# Altium PCB ecupcb.PcbDoc (part 2 of 2)
Units mil, origin at the board's own origin, x right, y up, seen from the top; angles counter-clockwise.
Board outline 2295 x 3625 mil, 2 copper layers (Top Layer, Bottom Layer); 63 components, 47 nets, 207 pads, 33 vias.
Unrouted connection lines stored in the file: 1.
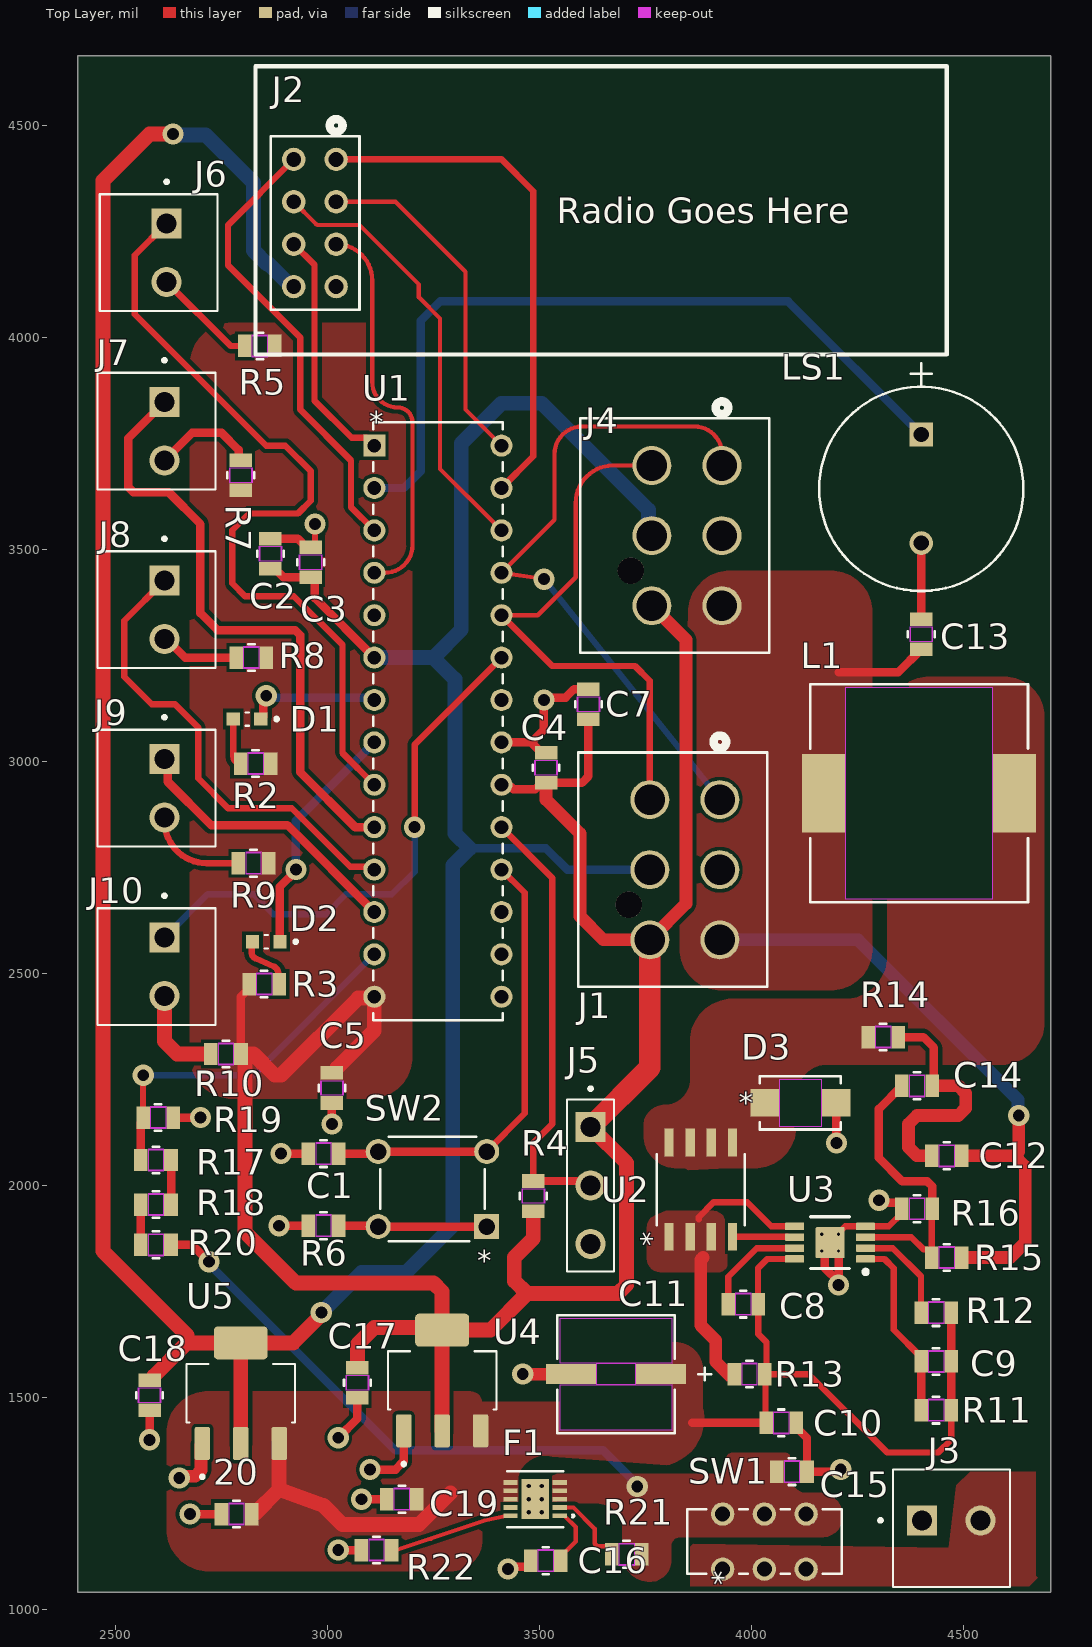
[diagram p0: Top Layer view]

## Part data (continued)
R19 R20: library part "RES 41.2K 1% 0.125W 0805", "Fixed Resistor, Metal Glaze/thick Film, 0.125W, 41200ohm, 150V, 1% +/-Tol, 100ppm/Cel, Surface Mount, 0805", Case/Package=0805, Manufacturer=Vishay, Manufacturer Part Number=CRCW080541K2FKEA, Max Operating Temperature=155°C, Min Operating Temperature=-55°C, Package Height=0.45mm, Package Length=2mm, Package Shape=Rectangular, Package Width=1.25mm, Power=125mW, Rated Temperature=70°C, Resistor Type="FIXED RESISTOR", Temperature Coefficient (ppm/Cel)=100, Tolerance=1%, Working Voltage=150V, Category="Chip SMD Resistors", ComponentLink1Description=https://datasheet.ciiva.com:443/pdfs/VipMasterIC/IC/VISH/VISH-S-A0007266705/VISH-S-A0007266705-1.pdf?src-supplier=IHS+Markit, ComponentLink1URL=https://datasheet.ciiva.com:443/pdfs/VipMasterIC/IC/VISH/VISH-S-A0007266705/VISH-S-A0007266705-1.pdf?src-supplier=IHS+Markit, ComponentLink2Description=https://datasheet.ciiva.com/2467/dcrcwe3-2467875.pdf?src-supplier=Digikey, ComponentLink2URL=https://datasheet.ciiva.com/2467/dcrcwe3-2467875.pdf?src-supplier=Digikey, ComponentLink3Description=https://datasheet.ciiva.com/2467/dcrcwe3-2467876.pdf?src-supplier=Digikey, ComponentLink3URL=https://datasheet.ciiva.com/2467/dcrcwe3-2467876.pdf?src-supplier=Digikey, ComponentLink4Description=https://datasheet.ciiva.com/2467/dcrcwe3-2467877.pdf?src-supplier=Digikey, ComponentLink4URL=https://datasheet.ciiva.com/2467/dcrcwe3-2467877.pdf?src-supplier=Digikey, ComponentLink5Description=https://datasheet.ciiva.com/9009/dcrcwe3-9009672.pdf?src-supplier=Avnet, ComponentLink5URL=https://datasheet.ciiva.com/9009/dcrcwe3-9009672.pdf?src-supplier=Avnet, ComponentLink6Description=https://datasheet.ciiva.com/5552/dcrcwe3-109170-5552669.pdf?src-supplier=Mouser, ComponentLink6URL=https://datasheet.ciiva.com/5552/dcrcwe3-109170-5552669.pdf?src-supplier=Mouser, ComponentLink7Description=https://datasheet.ciiva.com/7671/1697337-7671701.pdf?src-supplier=Element14, ComponentLink7URL=https://datasheet.ciiva.com/7671/1697337-7671701.pdf?src-supplier=Element14, ComponentLink8Description=https://datasheet.ciiva.com/7725/125364-7725967.pdf?src-supplier=Element14, ComponentLink8URL=https://datasheet.ciiva.com/7725/125364-7725967.pdf?src-supplier=Element14, ComponentLink9Description=https://datasheet.ciiva.com/22702/1697337-22702910.pdf?src-supplier=Element14, ComponentLink9URL=https://datasheet.ciiva.com/22702/1697337-22702910.pdf?src-supplier=Element14, ComponentLink10Description=https://datasheet.ciiva.com/16200/dcrcwe3-16200485.pdf?src-supplier=Future+Electronics, ComponentLink10URL=https://datasheet.ciiva.com/16200/dcrcwe3-16200485.pdf?src-supplier=Future+Electronics, Construction=Chip, JESD-609 Code=e3, Mounting Technology="Surface Mount", Packaging="Tape and Reel", Pins=2, Pricing="1=0.0041 (USD)", Reach SVHC Compliant=Yes, Reference Standard=AEC-Q200, RoHS=Yes, RoHS Compliant=Yes, Stock=1, Supplier="Arrow Electronics", Supplier Part Number=CRCW080541K2FKEA, Technology="METAL GLAZE/THICK FILM", Terminal Finish=Nickel, Termination=Wraparound
R21: library part "RES 1M 0.1% 0.26W 0805", "Fixed Resistor, Thin Film, 0.125W, 1000000ohm, 150V, 0.1% +/-Tol, 10ppm/Cel, Surface Mount, 0805", Case/Package=0805, Manufacturer="Vishay Dale", Manufacturer Part Number=TNPW08051M00BYEA, Max Operating Temperature=125°C, Min Operating Temperature=-55°C, Package Height=0.45mm, Package Length=2mm, Package Width=1.25mm, Power=125mW, Rated Temperature=70°C, Resistor Type="FIXED RESISTOR", Supplier Part Number=541-TNPW08051M00BYEACT-ND, Temperature Coefficient (ppm/Cel)=10, Tolerance=0.1%, Working Voltage=150V, Category="Chip SMD Resistors", ComponentLink1Description=https://datasheet.ciiva.com:443/pdfs/VipMasterIC/IC/VISH/VISH-S-A0009889625/VISH-S-A0009889625-1.pdf?src-supplier=IHS+Markit, ComponentLink1URL=https://datasheet.ciiva.com:443/pdfs/VipMasterIC/IC/VISH/VISH-S-A0009889625/VISH-S-A0009889625-1.pdf?src-supplier=IHS+Markit, ComponentLink2Description=http://www.vishay.com/docs/28758/tnpw_e3.pdf?src-supplier=Digikey, ComponentLink2URL=http://www.vishay.com/docs/28758/tnpw_e3.pdf?src-supplier=Digikey, ComponentLink3Description=http://www.vishay.com/docs/28758/tnpw_e3.pdf?src-supplier=Avnet, ComponentLink3URL=http://www.vishay.com/docs/28758/tnpw_e3.pdf?src-supplier=Avnet, Construction=Chip, Mounting Technology="Surface Mount", Packaging="Tape and Reel", Pins=2, Pricing="1=0.8, 10=0.665, 50=0.5832, 100=0.552, 500=0.41224, 1000=0.37822 (USD)", Reach SVHC Compliant=Yes, Reference Standard=AEC-Q200, RoHS=Yes, RoHS Compliant=Yes, Stock=10004, Supplier=Digikey, Technology="THIN FILM", Terminal Finish=Nickel, Termination=Wraparound
R22: library part "RES 142K 0.1% 1/8W 0805", "Fixed Resistor, Thin Film, 0.125W, 142000ohm, 150V, 0.1% +/-Tol, 25ppm/Cel, Surface Mount, 0805", Case/Package=0805, Manufacturer=Yageo, Manufacturer Part Number=RT0805BRD07142KL, Manufacturer Series=RT, Max Operating Temperature=155°C, Min Operating Temperature=-55°C, Package Height=0.5mm, Package Length=2mm, Package Shape=Rectangular, Package Width=1.25mm, Power=125mW, Rated Temperature=70°C, Resistor Type="FIXED RESISTOR", Supplier Part Number=13-RT0805BRD07142KLCT-ND, Temperature Coefficient (ppm/Cel)=25, Tolerance=0.1%, Working Voltage=150V, Category="Chip SMD Resistors", ComponentLink1Description=https://datasheet.ciiva.com:443/pdfs/VipMasterIC/IC/YAGO/YAGOS01974/YAGOS01974-1.pdf?src-supplier=IHS+Markit, ComponentLink1URL=https://datasheet.ciiva.com:443/pdfs/VipMasterIC/IC/YAGO/YAGOS01974/YAGOS01974-1.pdf?src-supplier=IHS+Markit, ComponentLink2Description=https://www.yageo.com/upload/media/product/productsearch/datasheet/rchip/PYu-RT_1-to-0.01_RoHS_L_12.pdf?src-supplier=Digikey, ComponentLink2URL=https://www.yageo.com/upload/media/product/productsearch/datasheet/rchip/PYu-RT_1-to-0.01_RoHS_L_12.pdf?src-supplier=Digikey, Construction=Chip, JESD-609 Code=e3, Mounting Technology="Surface Mount", Packaging="Tape and Reel", Pins=2, Pricing="1=0.17, 10=0.122, 50=0.0958, 100=0.086, 500=0.06622, 1000=0.05881 (USD)", Reach SVHC Compliant=Yes, RoHS=Yes, RoHS Compliant=Yes, Series=RT, Stock=9837, Supplier=Digikey, Technology="THIN FILM", Terminal Finish=Nickel, Termination=Wraparound
SW1: "Slide Switch, 1 Positions, DPDT, Latched, 0.3A, 6VDC, 6 PCB Hole Cnt, Solder Terminal, Through Hole-straight", Actuator Color=Black, Contact Current(DC)-Max=300mA, Contact DC Max Rating R Load=.3A@6VDC, Contact Resistance=0.07mR, Contact Voltage(DC)-Max=6V, Dielectric Withstand Volts=500VACV, Insulation Resistance=100MR, Manufacturer="ITT C&K", Manufacturer Part Number=JS202011CQN, Manufacturer Series=JS, Max Operating Temperature=85°C, Min Operating Temperature=-40°C, Supplier Part Number=401-2001-ND, Actuator Length=0.079inch, Actuator Material=Nylon, Actuator Type=SLIDE, Additional Feature="Low Profile", Body Breadth=3.6mm, Body Height=3.5mm, Body Length or Diameter=9mm, Category="Slide Switches", Center Contact Plating=Silver, ComponentLink1Description=https://datasheet.ciiva.com:443/pdfs/VipMasterIC/IC/CKCI/CKCI-S-A0001404160/CKCI-S-A0002247603-1.pdf?src-supplier=IHS+Markit, ComponentLink1URL=https://datasheet.ciiva.com:443/pdfs/VipMasterIC/IC/CKCI/CKCI-S-A0001404160/CKCI-S-A0002247603-1.pdf?src-supplier=IHS+Markit, ComponentLink2Description=https://datasheet.ciiva.com/8082/js-9dec14-8082522.pdf?src-supplier=Avnet, ComponentLink2URL=https://datasheet.ciiva.com/8082/js-9dec14-8082522.pdf?src-supplier=Avnet, ComponentLink3Description=https://datasheet.ciiva.com/2889/js-9dec14-2889166.pdf?src-supplier=Digikey, ComponentLink3URL=https://datasheet.ciiva.com/2889/js-9dec14-2889166.pdf?src-supplier=Digikey, ComponentLink4Description=https://datasheet.ciiva.com/5280/js-15sept15-5280375.pdf?src-supplier=Mouser, ComponentLink4URL=https://datasheet.ciiva.com/5280/js-15sept15-5280375.pdf?src-supplier=Mouser, ComponentLink5Description=https://datasheet.ciiva.com/22630/1707718-22630695.pdf?src-supplier=Element14, ComponentLink5URL=https://datasheet.ciiva.com/22630/1707718-22630695.pdf?src-supplier=Element14, Contact Material="Copper Alloy", End Contact Material="Copper Alloy", End Contact Plating=Silver, Housing Material=Nylon, JESD-609 Code=e4, Mounting Technology="Through Hole", Number of Positions=1, PCB Hole Count=6, Pricing="1=0.71, 10=0.624, 25=0.5904, 100=0.5424, 250=0.51252, 500=0.49084, 1000=0.46997, 3000=0.43849, 5000=0.42451 (USD)", Reach SVHC Compliant=Yes, RoHS=Yes, RoHS Compliant=Yes, Stock=6723, Supplier=Digikey, Switch Action=LATCHED, Switch Function=DPDT, Switch Type="Slide Switch", Terminal Finish=Silver, Terminal Length=0.118inch, Terminal Material=Brass, Termination=Solder
SW2: "Keypad Switch, 1 Switches, SPST, Momentary-tactile, 0.05A, 24VDC, 2.06N, 4 PCB Hole Cnt, Solder Terminal, Through Hole-straight", Contact Current(DC)-Max=50mA, Contact DC Max Rating R Load=.05A@24VDC, Contact Voltage(DC)-Max=24V, Manufacturer="TE Connectivity Alcoswitch", Manufacturer Part Number=1825910-6, Max Operating Temperature=85°C, Min Operating Temperature=-35°C, Operating Force-Max=2.06N, Body Breadth=5.99mm, Body Height=3.61mm, Body Length or Diameter=5.99mm, Category="Pushbutton Switches", Circuit Configuration=1X1, ComponentLink1Description=https://datasheet.ciiva.com:443/pdfs/VipMasterIC/IC/TYEL/TYEL-S-A0008869674/TYEL-S-A0008850909-1.pdf?src-supplier=IHS+Markit, ComponentLink1URL=https://datasheet.ciiva.com:443/pdfs/VipMasterIC/IC/TYEL/TYEL-S-A0008869674/TYEL-S-A0008850909-1.pdf?src-supplier=IHS+Markit, ComponentLink2Description=https://datasheet.ciiva.com/30199/1825910-6rqpn1825910-6-30199520.pdf?src-supplier=Onlinecomponents.com, ComponentLink2URL=https://datasheet.ciiva.com/30199/1825910-6rqpn1825910-6-30199520.pdf?src-supplier=Onlinecomponents.com, ComponentLink3Description=https://datasheet.ciiva.com/15184/getdatasheetpartid-395915-15184509.pdf?src-supplier=Verical, ComponentLink3URL=https://datasheet.ciiva.com/15184/getdatasheetpartid-395915-15184509.pdf?src-supplier=Verical, Mounting Technology="Through Hole", Number of Switches=1, Pricing="1=0.04963, 10=0.04908, 30=0.04866, 50=0.04823, 100=0.0478 (USD)", Reach SVHC Compliant=Yes, RoHS=Yes, RoHS Compliant=Yes, Stock=150345, Supplier=Avnet, Supplier Part Number=1825910-6, Switch Action=MOMENTARY, Switch Function=SPST, Switch Type=Keypad, Termination=Solder
U1: "RISC Microcontroller, 8-Bit, FLASH, AVR CPU, 24MHz, CMOS, PDIP28", Manufacturer=Microchip, Supplier Part Number=12AJ7043, Category=Microcontrollers, ComponentLink1Description=http://ww1.microchip.com/downloads/en/DeviceDoc/AVR128DB28-32-48-64-DataSheet-DS40002247A.pdf?src-supplier=Digikey, ComponentLink1URL=http://ww1.microchip.com/downloads/en/DeviceDoc/AVR128DB28-32-48-64-DataSheet-DS40002247A.pdf?src-supplier=Digikey, ComponentLink2Description=https://datasheet.octopart.com/AVR128DB28-I-SP-Microchip-datasheet-168930144.pdf?src-supplier=microchipDIRECT, ComponentLink2URL=https://datasheet.octopart.com/AVR128DB28-I-SP-Microchip-datasheet-168930144.pdf?src-supplier=microchipDIRECT, Manufacturer Part Number=AVR128DB28-I/SP, Pricing="1=5.04, 10=4.9, 30=4.76, 60=4.62, 105=4.41, 510=4.2 (CAD)", RoHS=No, Stock=41, Supplier=Newark
U2: "Power Field-Effect Transistor, 5A I(D), 1-Element, P-Channel, Metal-oxide Semiconductor FET"
U3: "Switching Controller, Voltage-mode, 10A, 1000kHz Switching Freq-Max, PDSO8", Case/Package=HTSSOP, Frequency=1MHz, Max Operating Temperature=125°C, Max Supply Voltage=42V, Min Operating Temperature=-40°C, Pins=8, RoHS Compliant=Yes
U4: "Fixed Positive LDO Regulator, 5V, 0.6V Dropout, PDSO4", Case/Package=SOP, Dropout Voltage1-Max=600mV, Manufacturer=STMicroelectronics, Max Supply Voltage=18V, Min Input Voltage=6V, Operating Temperature, TJ-Max=125°C, Operating Temperature, TJ-Min=-40°C, Output Current1-Max=1.2A, Output Voltage1-Max=5.15V, Output Voltage1-Min=4.85V, Output Voltage1-Nom=5V, Package Body Material=Plastic, Package Shape=Rectangular, Package Style="SMALL OUTLINEMeter", Category="Voltage Regulators - Linear", Channels=1, ComponentLink1Description=https://datasheet.ciiva.com:443/pdfs/VipMasterIC/IC/SGST/SGST-S-A0010030722/SGST-S-A0010030722-1.pdf?src-supplier=IHS+Markit, ComponentLink1URL=https://datasheet.ciiva.com:443/pdfs/VipMasterIC/IC/SGST/SGST-S-A0010030722/SGST-S-A0010030722-1.pdf?src-supplier=IHS+Markit, ComponentLink2Description=http://www.farnell.com/datasheets/2259188.pdf?src-supplier=Farnell, ComponentLink2URL=http://www.farnell.com/datasheets/2259188.pdf?src-supplier=Farnell, ComponentLink3Description=http://www.st.com/content/ccc/resource/technical/document/datasheet/group3/0e/5a/00/ca/10/1a/4f/a5/DM00366442/files/DM00366442.pdf/jcr:content/translations/en.DM00366442.pdf?src-supplier=Digikey, ComponentLink3URL=http://www.st.com/content/ccc/resource/technical/document/datasheet/group3/0e/5a/00/ca/10/1a/4f/a5/DM00366442/files/DM00366442.pdf/jcr:content/translations/en.DM00366442.pdf?src-supplier=Digikey, ComponentLink4Description=http://www.farnell.com/datasheets/2259188.pdf?src-supplier=Newark, ComponentLink4URL=http://www.farnell.com/datasheets/2259188.pdf?src-supplier=Newark, Height - Seated (Max)=1.9mm, JESD-30 Code=R-PDSO-G4, Length=6.5mm, Manufacturer Part Number=LDL1117S50R, Pins=4, Pricing="1=0.4496, 10=0.2819, 25=0.2795, 50=0.2738, 100=0.2253, 250=0.2208, 500=0.2045, 1000=0.1573 (USD)", Reach SVHC Compliant=Yes, Regulator Type="FIXED POSITIVE SINGLE OUTPUT LDO REGULATOR", RoHS=Yes, RoHS Compliant=Yes, Stock=195470, Supplier="Arrow Electronics", Supplier Part Number=LDL1117S50R, Surface Mount=Yes, Terminal Form="Gull Wing", Terminal Pitch=2.3mm, Terminal Position=DUAL, Width=3.5mm
U5: "Fixed Positive LDO Regulator, 3.3V, 0.6V Dropout, PDSO4"

## Via types
v1: diameter 50, hole 28, Top Layer to Bottom Layer, 29 vias
v2: diameter 15.75, hole 7.87, Top Layer to Bottom Layer, 4 vias

## Nets (pads, with @x,y where several pads share a name; then routed paths per layer and width w, separated by ;. In a path a pad name is that pad's centre, name@x,y a point inside that pad or via, vN(x,y) a via of type N, cw(c..) or ccw(c..) an arc to the next point about the centre after c; other vN are vias at no path point)
3V3: C2.2 C3.2 C18.2 J1.5 J2.5 J4.5 U1.6 U5.2 U5.4 | length 8169.9
  Top Layer w20: C2.2 2875.5,3454.5 2895.5,3434.5 C3.2 2963.78,3434.5 2969.78,3428.5 2969.78,3385.22 U1.6
  Top Layer w35: C18.2@2589.75,1550.25 2668.2,1628.7 ; v1(2635,4480) 2580,4480 2470,4370 2470,1845 2668.2,1646.8 2668.2,1628.7 ; U5.2 U5.4 ; v1(2985,1700) 2985,1695 2918.7,1628.7 U5.4 ; 2668.2,1628.7 U5.4
  Bottom Layer w20: 3335,2795 3514.91,2795 3565.26,2744.65 J1.5
  Bottom Layer w35: v1(2635,4480) 2637.5,4477.5 2712.5,4477.5 2825,4365 2825,4205 2856.68,4173.32 2861.26,4173.32 2914.59,4120 J2.5 ; v1(2985,1700) 3080,1795 3185,1795 3295,1905 3295,2755 3335,2795 3300,2830 3300,3194.33 3249.33,3245 ; U1.6 3249.33,3245 ; J4.5 3756.32,3540.97 3756.32,3593.68 3505,3845 3410,3845 3315,3750 3315,3310.5 3249.5,3245 3249.33,3245
5V: C4.2 C5.1 C7.2 C17.2 J1.6 J4.6 J5.01 R2.1 R3.1 R4.2 R5.2 R7.2 R8.2 R9.2 R10.2 U1.14 U1.20 U4.2 U4.4 | length 5650.1
  Top Layer w20: R10.2 2795.5,2445.5 2814.5,2464.5 R3.1 ; U1.20 3416.12,2938.88 3433.84,2938.88 3437.72,2935 3490,2935 3504.5,2949.5 C4.2 3599.5,2949.5 3615,2965 C7.2
  Top Layer w30: C4.2@3515,2935 3515,2910 3595,2830 3595,2635 3650.71,2579.29 J1.6 3845,2664.64 3845,3286.93 J4.6
  Top Layer w35: C5.1@3022.25,2277.75 3110,2365.5 U1.14 3106.75,2441.75 3071.75,2441.75 2890,2260 2875,2260 2825,2310 2805,2310 2805,1890 2925,1770 3249.5,1770 3270,1749.5 U4.4 ; C17.2@3070,1580 3070,1625 3110,1665 3263.7,1665 U4.4 ; U4.2 U4.4 ; R4.2@3485,1930 3485,1875 3440,1830 3440,1775 3470,1745 ; J5.01 3705,2052.8 3705,1765.5 3684.5,1745 3470,1745 ; U4.4 3383.7,1658.7 3470,1745
  Top Layer w50: J5.01 3759.65,2277.45 J1.6
7V2: C12.2 C13.2 J1.3 J4.3 L1.2 R15.2 | length 1693.7
  Top Layer w20: 4205,3210 4345.5,3210 C13.2
  Top Layer w30: C12.2@4505,2070 4620,2070 ; R15.2@4510,1830 4610,1830 4645,1865 4645,2045 4620,2070 ; v1(4630,2165) 4630,2080 4620,2070
  Bottom Layer w30: J1.3 4250.71,2579.29 4628,2202 4628,2167 v1(4630,2165)
BatCheck: R17.2 R19.2 U1.13 | length 851.2
  Top Layer w15: R19.2 2564.5,2249.5 2565,2250 v1(2565,2260)
  Top Layer w20: R17.2 R19.2@2559.5,2147.93
  Bottom Layer w15: v1(2565,2260) 2825,2260 U1.13
GND: 20.1 C1.2 C2.1 C3.1 C4.1 C5.2 C7.1 C10.1 C11.2 C13.1 C15.1 C16.1 C17.1 C18.1 C19.1 D3.2 F1.11 J1.2 J2.4 J3.1 J4.2 J5.03 LS1.2 R6.2 R16.1 R19.1 R22.1 U1.15 U1.21 U3.4 U3.9 U4.1 U5.1 | length 2486.9
  Top Layer w15: C3.1 2961.5,3505.5 2970,3514 v1(2970,3560) ; v2(4204.69,1884.69) 4204.69,1887.05 4221.02,1903.39 U3.4 4323.39,1903.39 4354.5,1934.5 R16.1
  Top Layer w20: v1(2580,1400) C18.1 ; R19.1 v1(2700,2160) ; v1(2675,1225) 20.1 ; C2.1 2929.5,3525.5 2949.5,3505.5 C3.1 ; v1(2885,1905) R6.2 ; v1(2890,2075) C1.2 ; v1(3010,2145) C5.2 ; v1(3025,1140) R22.1 ; v1(3025,1405) 3070,1450 C17.1 ; v1(3080,1260) C19.1 ; v1(3100,1330) 3160,1330 3179.45,1349.45 U4.1@3179.45,1415.81 ; U1.21 3480,3045 ; v1(3425,1095) 3430.74,1100.74 3473,1100.74 3479,1106.74 C16.1 ; C4.1 3504.5,3020.5 3480,3045 ; C7.1 3581.04,3170.5 3561.28,3150.74 3515.74,3150.74 v1(3510,3145) 3510,3075 3480,3045 ; C10.1 4105.5,1429.5 4130.5,1404.5 C15.1 4205,1325 v1(4210,1330) ; v2(4165.31,1845.32) 4172.08,1845.32 4172.08,1806.04 v1@4205,1773.12 ; D3.2 4200,2194.5 v1(4200,2100) ; v2(4204.69,1845.32) 4205,1845 v1@4205,1773.12 ; v1(4205,1765) v1@4205,1773.12 ; v1@4300,1956.88 v1(4300,1965) ; v1@4305.74,1959.26 4348.5,1959.26 4354.5,1953.26 R16.1 ; C13.1 LS1.2
  Top Layer w30: v1(2650,1310) 2653.83,1313.83 2686.88,1313.83 2701.14,1328.09 2701.14,1387.99 U5.1 ; v1(3460,1555) C11.2
  other v2: 4165.31,1884.69
I2CSCL: J1.4 J4.4 U1.24 | length 1311.4
  Top Layer w10: U1.24 3495.36,3345 3585,3434.64 3585,3561.42 3585,3610 cw(c3673.03,3610) 3673.03,3698.03 J4.4
  Top Layer w15: U1.24 3530,3225 3725,3225 3759.65,3190.35 J1.4
I2CSDA: J1.1 J4.1 U1.25 | length 1594.3
  Top Layer w10: v1(3510,3430) U1.25 3535,3570 3535,3725 cw(c3600,3725) 3600,3790 3865,3790 cw(c3865,3725.04) 3929.96,3725.04 J4.1
  Bottom Layer w15: v1(3510,3430) J1.1
LiBar: J9.1 U1.12 | length 671.3
  Top Layer w20: J9.1 2622.92,2997.87 2622.92,2952.08 2725,2850 2905,2850 U1.12
LiExtra: J10.1 U1.23 | length 1282.7
  Top Layer w15: v1(3205,2845) 3205,3040 U1.23
  Bottom Layer w15: J10.1 2716.7,2686.5 2825.4,2686.5 2871.9,2640 2996.3,2640 3042.8,2686.5 3151.5,2686.5 3205,2740 v1(3205,2845)
LiHead: J6.1 U1.9 | length 1903.2
  Top Layer w15: J6.1 2545,4193.8 2545,4055 2855,3745 2900,3745 2960,3685 2960,3615 2930,3585 2815,3585 2775,3545 2775,3420 2805,3390 2920,3390 3035,3275 3035,3020 U1.9
LiTail1: J7.1 U1.10 | length 1460.8
  Top Layer w20: J7.1 2530,3762.8 2530,3646.72 2541.72,3635 2625,3635 2700,3560 2700,3350 2740,3310 2923.28,3310 2935,3298.28 2935,2975 3065,2845 U1.10
LiTail2: J8.1 U1.11 | length 1114.9
  Top Layer w15: J8.1 2520,3331.8 2520,3200 2585,3135 2640,3135 2695,3080 2695,2960 2765,2890 2915,2890 3053.21,2751.79 3103.21,2751.79 U1.11
Net20_2: 20.2 C8.2 C9.2 C10.2 C11.1 C19.2 F1.6 F1.7 F1.8 R11.2 R12.2 R13.2 U3.8 U4.3 U5.3 | length 2126.6
  Top Layer w15: C10.2 4032.5,1442 4032.5,1553 R13.2 ; U3.8 4036.61,1826.61 4015,1805 4015,1720.5 C8.2 4015.5,1649.5 4035,1630 4035,1559.5 R13.2 ; R11.2 4470.5,1400.5 4440,1370 4320,1370 4135,1555 R13.2
  Top Layer w20: 3860,1440 C10.2 ; R11.2 C9.2 R12.2
  Top Layer w35: 20.2@2827.5,1225 2885.55,1283.05 ; U5.3 2885.55,1283.05 ; 3290,1275 3215,1200 3035,1200 2990,1245 2885.55,1283.05
NetC1_1: C1.1 SW2.3 SW2.4 U1.18 | length 1062.5
  Top Layer w15: SW2.3 3465,2170 3465,2690 U1.18
  Top Layer w20: C1.1 SW2.4@3107.02,2075 ; SW2.4 SW2.3
NetC8_1: C8.1 U3.7 | length 249.4
  Top Layer w15: C8.1 3944.5,1753.96 3945,1754.46 3945,1785 4012.2,1852.2 U3.7
NetC9_1: C9.1 R11.1 U3.1 | length 437
  Top Layer w15: U3.1 4313.39,1826.61 4335,1805 4335,1660 4399.5,1595.5 C9.1
  Top Layer w20: R11.1 C9.1
NetC12_1: C12.1 C14.2 R14.2 | length 542.7
  Top Layer w15: C14.2 C14.2@4430,2239.5
  Top Layer w20: R14.2 4405,2350 4430,2325 C14.2@4430,2239.5
  Top Layer w30: C12.1@4410,2070 4390,2070 4370,2090 4370,2145 4390,2165 4487.43,2165 4505,2182.57 4505,2217.43 4487.43,2235 4445,2235
NetC14_1: C14.1 R15.1 R16.2 U3.3 | length 696.2
  Top Layer w15: U3.3 4376.7,1877.8 4405.5,1849 4416,1849 4424.5,1840.5 R15.1 4425,1830.5 4425,1944.5 R16.2
  Top Layer w20: C14.1 4300,2180.5 4300,2065 4355,2010 4413.78,2010 4425.5,1998.28 R16.2
NetC16_2: C16.2 F1.1 | length 142.2
  Top Layer w10: F1.1 3558.79,1220.63 3585,1194.42 3585,1160.5 3550,1125.5 C16.2
NetD1_A: D1.A R2.2 | length 114.7
  Top Layer w15: D1.A 2777.52,3011.98 ccw(c2794.5,3011.98) R2.2
NetD1_C: D1.C U1.7 | length 319.3
  Top Layer w20: D1.C 2848.23,3105.75 2848.23,3140.11 2855,3146.88 v1(2855,3155)
  Bottom Layer w20: v1(2855,3155) 2860,3150 3105,3150 U1.7
NetD2_A: D2.A R3.2 | length 136.1
  Top Layer w15: D2.A 2820.71,2566.75 2820.71,2549.36 ccw(c2835.71,2549.36) 2829.48,2535.71 2829.53,2535.69 2873.89,2515.62 cw(c2867.5,2501.5) 2883,2501.5 2883,2494 R3.2
NetD2_C: D2.C U1.8 | length 562.2
  Top Layer w20: D2.C 2887.48,2704.74 2925,2742.26 v1(2925,2745)
  Bottom Layer w20: v1(2925,2745) 2925,2860 U1.8
NetD3_1: D3.1 L1.1 R14.1 U2.5 U2.6 U2.7 U2.8
NetF1_2: F1.2 R21.1 | length 192.9
  Top Layer w10: F1.2 3579.68,1240.32 3630,1190 3630,1155 3635.86,1149.14 3658.5,1149.14 3669.5,1138.14 R21.1
NetF1_10: F1.10 R22.2 | length 294.1
  Top Layer w10: R22.2 3154.27,1138.07 3243.4,1166.87 3370.11,1209.66 3419.7,1220.12 F1.10
NetJ3_2: J3.2 SW1.1 SW1.2 SW1.3
NetJ6_2: J6.2 R5.1 | length 247
  Top Layer w15: J6.2 2771,3980 R5.1
NetJ7_2: J7.2 R7.1 | length 245.1
  Top Layer w20: J7.2 2680,3775 2750,3775 2790,3735 2790,3715.5 R7.1
NetJ8_2: J8.2 R8.1 | length 187.7
  Top Layer w20: J8.2 2619.54,3289 2663.54,3245 R8.1
NetJ9_2: J9.2 R9.1 | length 239.6
  Top Layer w15: J9.2 2615,2860 ccw(c2715,2860) 2715,2760 R9.1
NetJ10_2: J10.2 R10.1 | length 229.1
  Top Layer w35: J10.2@2621.86,2440.14 J10.2 2615,2340 2645,2310 R10.1@2715,2310
NetLS1_1: LS1.1 U1.2 | length 1810.3
  Bottom Layer w20: U1.2 3180,3645 3220,3685 3220,4040 3265,4085 4085.91,4085 LS1.1
NetR6_1: R6.1 SW2.1 SW2.2 | length 350.1
  Top Layer w20: R6.1 3113.87,1905 cw(c3113.87,1897.61) SW2.2 SW2.1
NetR12_1: R12.1 U3.2 | length 244
  Top Layer w15: U3.2 4332.8,1852.2 4399.5,1785.5 R12.1
NetR13_1: R13.1 U2.1 U2.2 U2.3 U3.5 | length 580.4
  Top Layer w15: 3875,1920 3875,1925 3910,1960 3990,1960 4046.61,1903.39 U3.5
  Top Layer w30: 3885,1830 3880,1825 3880,1670 3915,1635 3915,1585 R13.1@3950,1550
NetR17_1: R17.1 R18.1 | length 105
  Top Layer w20: R18.1 R17.1
NetR18_2: R18.2 R20.1 | length 95
  Top Layer w20: R20.1 R18.2
NetU2_4: U2.4 U3.6 | length 146.4
  Top Layer w10: U2.4 U2.4@3961,1878.71 ; U3.6@4083.7,1878.71 U3.6
  Top Layer w15: U2.4@3961,1878.71 U3.6@4083.7,1878.71
RaCE: J2.3 U1.4 | length 939.8
  Top Layer w10: J2.3 cw(c3020,4135) 3105,4135 3105,3895 ccw(c3165,3895) 3165,3835 cw(c3165,3800) 3200,3800 3200,3510 cw(c3135,3510) 3135,3445 U1.4
RaCSN: J2.6 U1.1 | length 574.2
  Top Layer w15: J2.6 2968.83,4171.17 2968.83,3851.17 3056.5,3763.5 3091.5,3763.5 U1.1
RaIRQ: J2.8 U1.3 | length 1082.1
  Top Layer w15: J2.8 2765,4265 2765,4170 2935,4000 2935,3830 3055,3710 3055,3600 U1.3
RaMISO: J2.1 U1.27 | length 1227.1
  Top Layer w15: J2.1 3410,4420 3485,4345 3485,3720 U1.27
RaMOSI: J2.7 U1.26 | length 1036
  Top Layer w10: J2.7 2971.46,4268.54 ccw(c2980,4277.07) 2980,4265 3028.58,4265 3075,4265 3215,4125 3215,4095 3265,4045 3265,3690 3381.02,3573.98 U1.26
RaSCK: J2.2 U1.28 | length 818.6
  Top Layer w10: J2.2 3060,4320 3160,4320 3230.71,4249.29 3325,4155 3325,3830 U1.28
UPDI: J5.02 R4.1 U1.19 | length 1040.7
  Top Layer w10: J5.02@3594.65,2010.5 cw(c3594.65,1974.65) J5.02
  Top Layer w15: U1.19 3530,2725 3530,2145 3485,2100 R4.1
  Top Layer w20: R4.1 J5.02@3594.65,2010.5
Vbat: C15.2 F1.3 F1.4 F1.5 R20.2 R21.2 SW1.4 SW1.5 SW1.6 | length 1341.4
  Top Layer w20: R20.2 2680,1860 v1(2720,1820)
  Bottom Layer w20: v1(2720,1820) 2720,1815.04 3160.04,1375 3650,1375 3730,1295 v1(3730,1290)
pads on no net: F1.9 F1.V J1.7 J4.7 U1.5 U1.16 U1.17 U1.22

## Polygon pours and split planes (outlines as drawn)
Net20_2 on Top Layer "NET20_2_L01_P033" (solid, pour order 33): 2620,1190 ccw(c2720,1190) 2720,1090 3290,1090 ccw(c3290,1165) 3365,1165 3365,1485 ccw(c3335,1485) 3335,1515 2720,1515 ccw(c2720,1415) 2620,1415 2620,1405
Net20_2 on Top Layer "NET20_2_L01_P027" (solid, pour order 27): 3450,1230 cw(c3405,1230) 3405,1185 3270,1185 cw(c3270,1285) 3170,1285 3170,1390 cw(c3270,1390) 3270,1490 3589.5,1490 ccw(c3589.5,1580.5) 3680,1580.5 cw(c3729.5,1580.5) 3729.5,1630 3820,1630 cw(c3820,1565) 3885,1565 3885,1475 cw(c3775,1450) 3800,1340 3530,1360 ccw(c3512.5,1297.5) 3450,1315
5V on Top Layer "5V_L01_P031" (solid, pour order 31): 3100,4035 cw(c3100,3935) 3200,3935 3200,2305 cw(c3100,2305) 3100,2205 2775,2205 cw(c2775,2305) 2675,2305 2675,3935 cw(c2775,3935) 2775,4035 2810,4035
Vbat on Top Layer "VBAT_L01_P029" (solid, pour order 29): 3545,1320 ccw(c3545,1295) 3520,1295 3520,1260 ccw(c3530,1260) 3530,1250 3635,1250 cw(c3635,1190) 3695,1190 3695,1130 ccw(c3760,1130) 3760,1065 ccw(c3760,1115) 3810,1115 3810,1150 cw(c3830,1150) 3830,1170 4165,1170 ccw(c4165,1220) 4215,1220 ccw(c4160,1220) 4160,1275 4130,1275 cw(c4130,1315) 4090,1315 4090,1360 ccw(c4080,1360) 4080,1370 3955,1370 ccw(c3955,1355) 3940,1355 3940,1330 cw(c3930,1330) 3930,1320 3860,1320
NetR13_1 on Top Layer "NETR13_1_L01_P020" (solid, pour order 20): 3772.23,1930 cw(c3782.23,1930) 3782.23,1940 3907.23,1940 cw(c3907.23,1905) 3942.23,1905 3942.23,1815 cw(c3922.24,1815) 3922.23,1795 3787.23,1795 cw(c3787.23,1830) 3752.23,1830 3752.23,1895 cw(c3797.23,1895) 3797.23,1940
NetD3_1 on Top Layer "NETD3_1_L01_P017" (solid, pour order 17): 3830,2035 cw(c3842.07,2022.93) 3842.07,2040 4005,2040 ccw(c4005,2140) 4105,2140 4105,2210 cw(c4180,2210) 4180,2285 4590,2285 ccw(c4590,2385) 4690,2385 4690,3105 ccw(c4595,3105) 4595,3200 4420,3200 ccw(c4420,3100) 4320,3100 4320,2540 cw(c4220,2540) 4220,2440 3955,2440 ccw(c3955,2340) 3855,2340 3855,2250 cw(c3795,2250) 3795,2190 ccw(c3795,2140) 3745,2140 3745,2120 ccw(c3825,2120) 3825,2040 3945,2040
7V2 on Top Layer "7V2_L01_P014" (solid, pour order 14): 3850,3345 3850,3350 cw(c3950,3350) 3950,3450 4185,3450 cw(c4185,3350) 4285,3350 4285,2560 cw(c4185,2560) 4185,2460 3930,2460 cw(c3930,2560) 3830,2560 3830,2655
NetJ3_2 on Top Layer "NETJ3_2_L01_P004" (solid, pour order 4): 3855,1155 3855,1055 4655,1055 4675,1075 4670,1080 4670,1325 4515,1325 4483.04,1293.04 4465,1145
GND on Bottom Layer "GND_L02_P000" (solid, pour order 0): 2420,4610 4685,4610 4685,1050 2420,1050

## Silkscreen, mask and mechanical layers (free items; w line width, h text height)
Top Overlay:
  lines w10: 2830,3960 2830,4640 4460,4640 4460,3960 2830,3960
  text "Radio Goes Here" at 3540,4270 h60
Bottom Overlay:
  drawing of 2484 lines, arcs and shapes, not listed
  text "Didsbury Diddlers" at 4565,4450 h70
  text "& Co. Est. 2006" at 4553,4347 h70
  text "ECU Board - Vikram Procter" at 4620,4225 h60

## Text inside footprints (layer, text, board x,y; h text height)
D3: Top Overlay "*" at 3969.5,2170 h50; Mechanical 13 "*" at 4022,2170 h50
SW1: Top Overlay "*" at 3956.57,1056.54 h50 r90; Mechanical 13 "*" at 3956.57,1091.54 h50 r90
SW2: Top Overlay "*" at 3387.5,1868.33 h50 r180; Mechanical 13 "*" at 3341.59,1925 h50 r180
U1: Top Overlay "*" at 3097.5,3776 h50; Mechanical 13 "*" at 3110,3720 h50
U2: Top Overlay "*" at 3788,1856.25 h50 r90; Mechanical 13 "*" at 3834.5,1914 h50 r90